# EAGLE board base2-polygon (EAGLE 6.5.0)
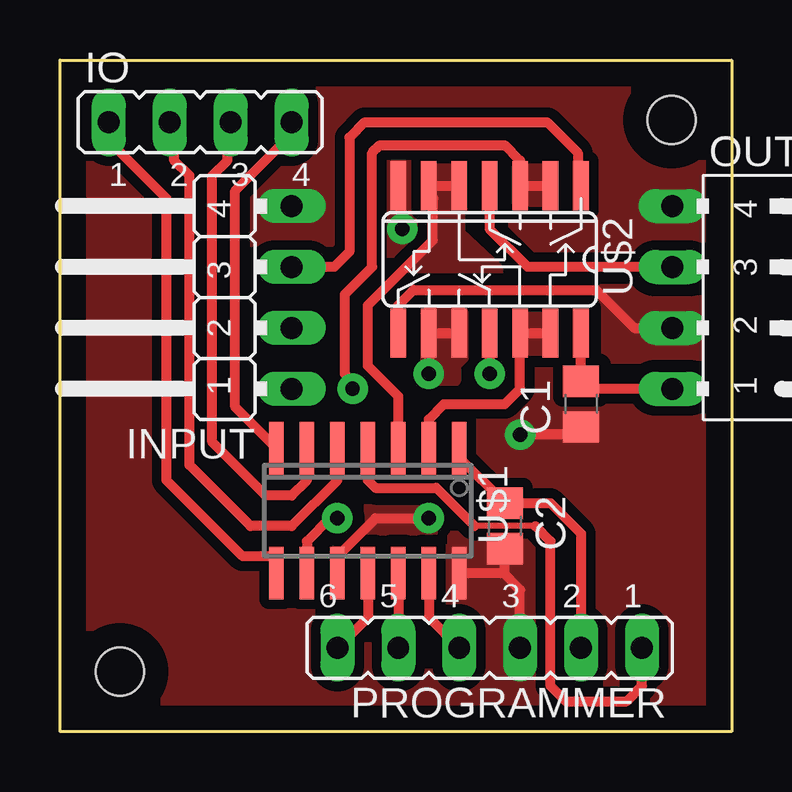
[diagram p0: board, top side]
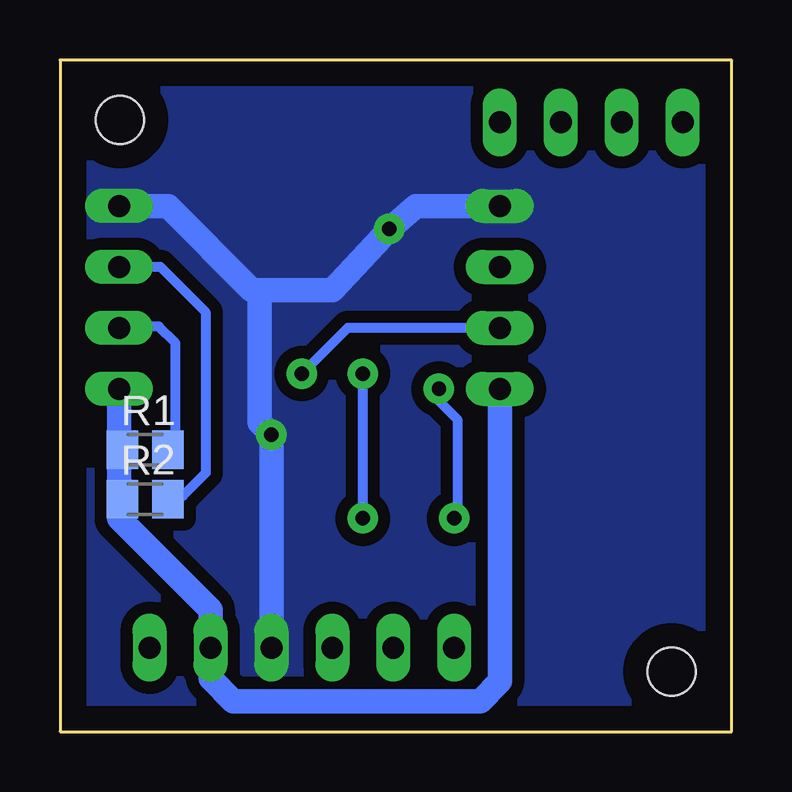
[diagram p1: board, bottom side, seen from below]

Size 28 x 28 mm. Coordinates in mm from the lower left corner, seen from the top.
Outline: 0,0 0,28 28,28 28,0 0,0
Copper layers (1*16): Top 0.035mm / dielectric 1.5mm / Bottom 0.035mm
Design rules "default": minimum track width 10mil, minimum drill 24mil, track to track 8mil, track to pad 8mil, pad to pad 8mil, via to via 8mil, smd to smd 8mil, copper to edge 40mil, drill to drill 8mil, minimum pad ring 10mil, minimum via ring 8mil, stop-mask expansion 4mil, vias tented up to drill 0mil, thermal gap 10mil
Holes 2 mm at 2.5,2.5 25.5,25.5

## Footprints (pad centres in the part's own frame; a part is rotated, then mirrored left to right if it is on the bottom)
C0805 = smd 1.3 x 1.5: 1 -0.95,0; 2 0.95,0
JUMPER4 = drill 0.914 long: 1 -2.54,-2.54; 2 0,-2.54; 3 2.54,-2.54; 4 5.08,-2.54
JUMPER4M = drill 0.914 long: 1 -3.81,0; 2 -1.27,0; 3 1.27,0; 4 3.81,0
JUMPER4F = drill 0.914 long: 1 3.81,-2.54; 2 1.27,-2.54; 3 -1.27,-2.54; 4 -3.81,-2.54
JUMPER6M = drill 0.914 long: 1 -6.35,0; 2 -3.81,0; 3 -1.27,0; 4 1.27,0; 5 3.81,0; 6 6.35,0
M0805 = smd 1.3 x 1.6: 1 -0.95,0; 2 0.95,0
16F1503 = smd 0.6 x 2.2: 1 -3.81,-2.6; 2 -2.54,-2.6; 3 -1.27,-2.6; 4 0,-2.6; 5 1.27,-2.6; 6 2.54,-2.6; 7 3.81,-2.6; 8 3.81,2.6; 9 2.54,2.6; 10 1.27,2.6; 11 0,2.6; 12 -1.27,2.6; 13 -2.54,2.6; 14 -3.81,2.6
4016 = smd 0.66 x 2.032: 1 -3.81,-3.073; 2 -2.54,-3.073; 3 -1.27,-3.073; 4 0,-3.073; 5 1.27,-3.073; 6 2.54,-3.073; 7 3.81,-3.073; 8 3.81,3.073; 9 2.54,3.073; 10 1.27,3.073; 11 0,3.073; 12 -1.27,3.073; 13 -2.54,3.073; 14 -3.81,3.073

## Placement (x,y rotation side)
C1  100nF  [C0805]  21.73,13.65 90 top
C2  100nF  [C0805]  18.55,8.57 270 top
INPUT  [JUMPER4]  7.12,16.83 90 top
IO  [JUMPER4M]  5.85,25.4 0 top
OUTPUT  [JUMPER4F]  28.07,18.1 270 top
PROGRAMMER  [JUMPER6M]  17.91,3.49 180 top
R1  [M0805]  24.45,11.75 0 bottom
R2  [M0805]  24.45,9.68 0 bottom
U$1  16F1503  [16F1503]  12.84,9.21 180 top
U$2  4016  [4016]  17.91,19.68 180 top

## Library data of the parts
C1 C2 = rcl
INPUT IO OUTPUT PROGRAMMER U$1 U$2 = !stavebnice03
R1 R2 = resistor

## Nets
GND: C1.1 C2.2 INPUT.4 OUTPUT.4 PROGRAMMER.3 U$1.14 U$2.7
N$3: OUTPUT.3 R2.2 U$2.4
N$4: U$1.10 U$2.9 U$2.10
N$5: U$1.3 U$2.5 U$2.6
N$6: U$1.2 U$2.12 U$2.13
N$7: U$1.9 U$2.2 U$2.3
N$8: INPUT.3 U$2.1
N$9: OUTPUT.2 R1.2 U$2.8
N$10: INPUT.2 U$2.11
N$11: PROGRAMMER.6 U$1.11
N$12: IO.2 U$1.5
N$13: PROGRAMMER.1 U$1.4
N$14: PROGRAMMER.4 U$1.13
N$15: PROGRAMMER.5 U$1.12
N$16: IO.4 U$1.7
N$17: IO.3 U$1.6
N$18: IO.1 U$1.8
VCC: C1.2 C2.1 INPUT.1 OUTPUT.1 PROGRAMMER.2 R1.1 R2.1 U$1.1 U$2.14

## Tracks (layer width: path | path; a pad name or v marks a point on that pad's centre or on a via)
GND  (via drill 0.6 pad 1.27)
  Top 0.406: v14.26,20.95 U$2.7 | C2.2 18.55,6.67 18.49,6.61 | U$1.14 18.49,6.61 | v19.18,12.38 21.41,12.38 C1.1 | PROGRAMMER.3 19.18,5.91 18.49,6.61
  Bottom 1.016: INPUT.4 13.15,21.91 v14.26,20.95 16.64,18.41 | PROGRAMMER.3 v19.18,12.38 19.68,12.88 19.68,18.41 | OUTPUT.4 23.5,21.91 20,18.41 19.68,18.41 | 16.83,18.41 19.68,18.41
  pour Bottom (isolate 0.508, no thermals): 0,0 0,27.94 27.94,27.94 27.94,0
  pour Top (isolate 0.406, rank 2, no thermals): 0,0 0,27.94 27.94,27.94 27.94,0
  pour Bottom (isolate 0.508, no thermals): 27.94,0 27.94,10.79 26.35,10.79 20.64,5.08 20.64,0
N$3
  Top 0.406: U$2.4 17.91,20.95 19.5,19.37 OUTPUT.3
  Bottom 0.406: R2.2 22.86,9.84 21.91,10.79 21.91,17.46 23.81,19.37 OUTPUT.3
N$4  (via drill 0.6 pad 1.27)
  Top 0.406: v15.38,14.92 U$2.9 U$2.10 | U$1.10 11.56,7.3 13.15,8.89 v15.38,8.89
  Bottom 0.406: v15.38,8.89 v15.38,14.92
  pour Top (no thermals): 15.24,17.46 16.83,17.46 16.83,15.56 16.51,15.24 16.51,14.61 15.24,14.61 14.92,14.92 15.24,15.24
  pour Top (isolate 0.508): 15.56,7.62 15.56,9.21 15.88,9.53 16.51,11.11 12.06,11.11 8.57,7.62
N$5
  Top 0.254: U$2.6 U$2.5 16.64,22.86 16.54,22.76
  Top 0.406: 16.54,22.76 U$2.6 15.38,22.41 15.56,22.23 15.53,20.48 12.84,17.78 12.84,15.24 14.11,13.97 U$1.3
  pour Top (isolate 0.508, no thermals): 15.24,23.5 16.67,23.5 16.67,20.8 18.89,18.73 14.29,18.73 14.29,19.05 15.4,20.16 15.4,20.32 15.56,20.48 15.72,22.07
N$6
  Top 0.254: U$2.13 20.45,15.88
  Top 0.406: U$2.13 U$2.12 19.18,14.29 18.55,13.65 16.01,13.65 15.38,13.02 U$1.2
  pour Top (no thermals): 19.21,17.3 20.48,17.3 20.48,15.88 19.21,15.88
N$7  (via drill 0.6 pad 1.27)
  Top 0.406: U$2.2 U$2.3 19.18,23.81 18.55,24.45 13.34,24.45 13.02,24.13 13.02,19.37 11.88,18.23 11.88,14.92 v12.2,14.29 | v11.56,8.89 11.25,8.89 10.29,7.94 U$1.9
  Bottom 0.406: v12.2,14.29 12.2,13.79 11.43,13.02 11.43,9.03 v11.56,8.89
  pour Top (no thermals): 19.05,23.5 20.48,23.5 20.48,22.07 19.05,22.07
N$8
  Top 0.406: 9.98,19.37 INPUT.3 11.43,19.37 12.06,20 12.06,24.77 12.7,25.4 20.32,25.4 21.59,24.13 21.59,22.89 U$2.1
N$9
  Top 0.406: U$2.8 14.11,17.78 14.74,18.41 22.36,18.41 23.95,16.83 OUTPUT.2
  Bottom 0.406: R1.2 23.18,12.06 23.18,16.19 23.88,16.89 25.47,16.89 OUTPUT.2
  pour Top (isolate 0.508, no thermals): 22.54,18.41 22.54,15.56 26.67,15.56 26.67,19.05 23.18,19.05
N$10  (via drill 0.6 pad 1.27)
  Top 0.406: U$2.11 v17.91,14.92
  Bottom 0.406: INPUT.2 16.01,16.83 v17.91,14.92
N$11
  Top 0.406: U$1.11 12.84,4.76 PROGRAMMER.6
N$12
  Top 0.406: U$1.5 11.56,10.48 9.66,8.57 7.94,8.57 5.4,11.11 5.4,23.18 4.76,23.81 4.76,25.22 IO.2
N$13
  Top 0.254: 19.82,8.57 17.28,8.57
  Top 0.406: U$1.4 12.84,10.48 13.15,10.16 15.69,10.16 17.28,8.57 | PROGRAMMER.1 24.27,1.91 23.63,1.27 21.09,1.27 20.45,1.91 20.45,7.94 19.82,8.57
N$14
  Top 0.254: U$1.13 15.38,6.03
  Top 0.406: 15.38,6.03 15.38,4.76 PROGRAMMER.4
N$15
  Top 0.406: U$1.12 PROGRAMMER.5
N$16
  Top 0.406: U$1.7 7.3,13.53 7.3,22.54 9.66,24.9 IO.4
N$17
  Top 0.406: U$1.6 10.29,10.48 9.66,9.84 8.57,9.84 6.35,12.06 6.35,23.18 6.99,23.81 6.99,25.27 IO.3
N$18
  Top 0.406: U$1.8 8.96,6.67 8.96,7.23 8.89,7.3 7.62,7.3 4.45,10.48 4.45,22.23 1.91,24.77 1.91,25.27 IO.1
VCC
  Top 0.254: U$2.14 21.73,15.88
  Top 0.406: 21.73,15.88 C1.2 22.04,14.29 OUTPUT.1 | U$1.1 16.64,11.43 C2.1 20.46,9.52 21.73,8.26 PROGRAMMER.2
  Bottom 0.406: 9.66,8.89 | R1.1 R2.1 25.54,9.84 25.54,8.89
  Bottom 1.016: OUTPUT.1 25.54,8.89 21.73,5.08 PROGRAMMER.2 21.73,2.22 20.77,1.27 10.48,1.27 9.66,2.09 9.66,8.89 INPUT.1